# EAGLE board Main_transmitter (EAGLE 9.7.0)
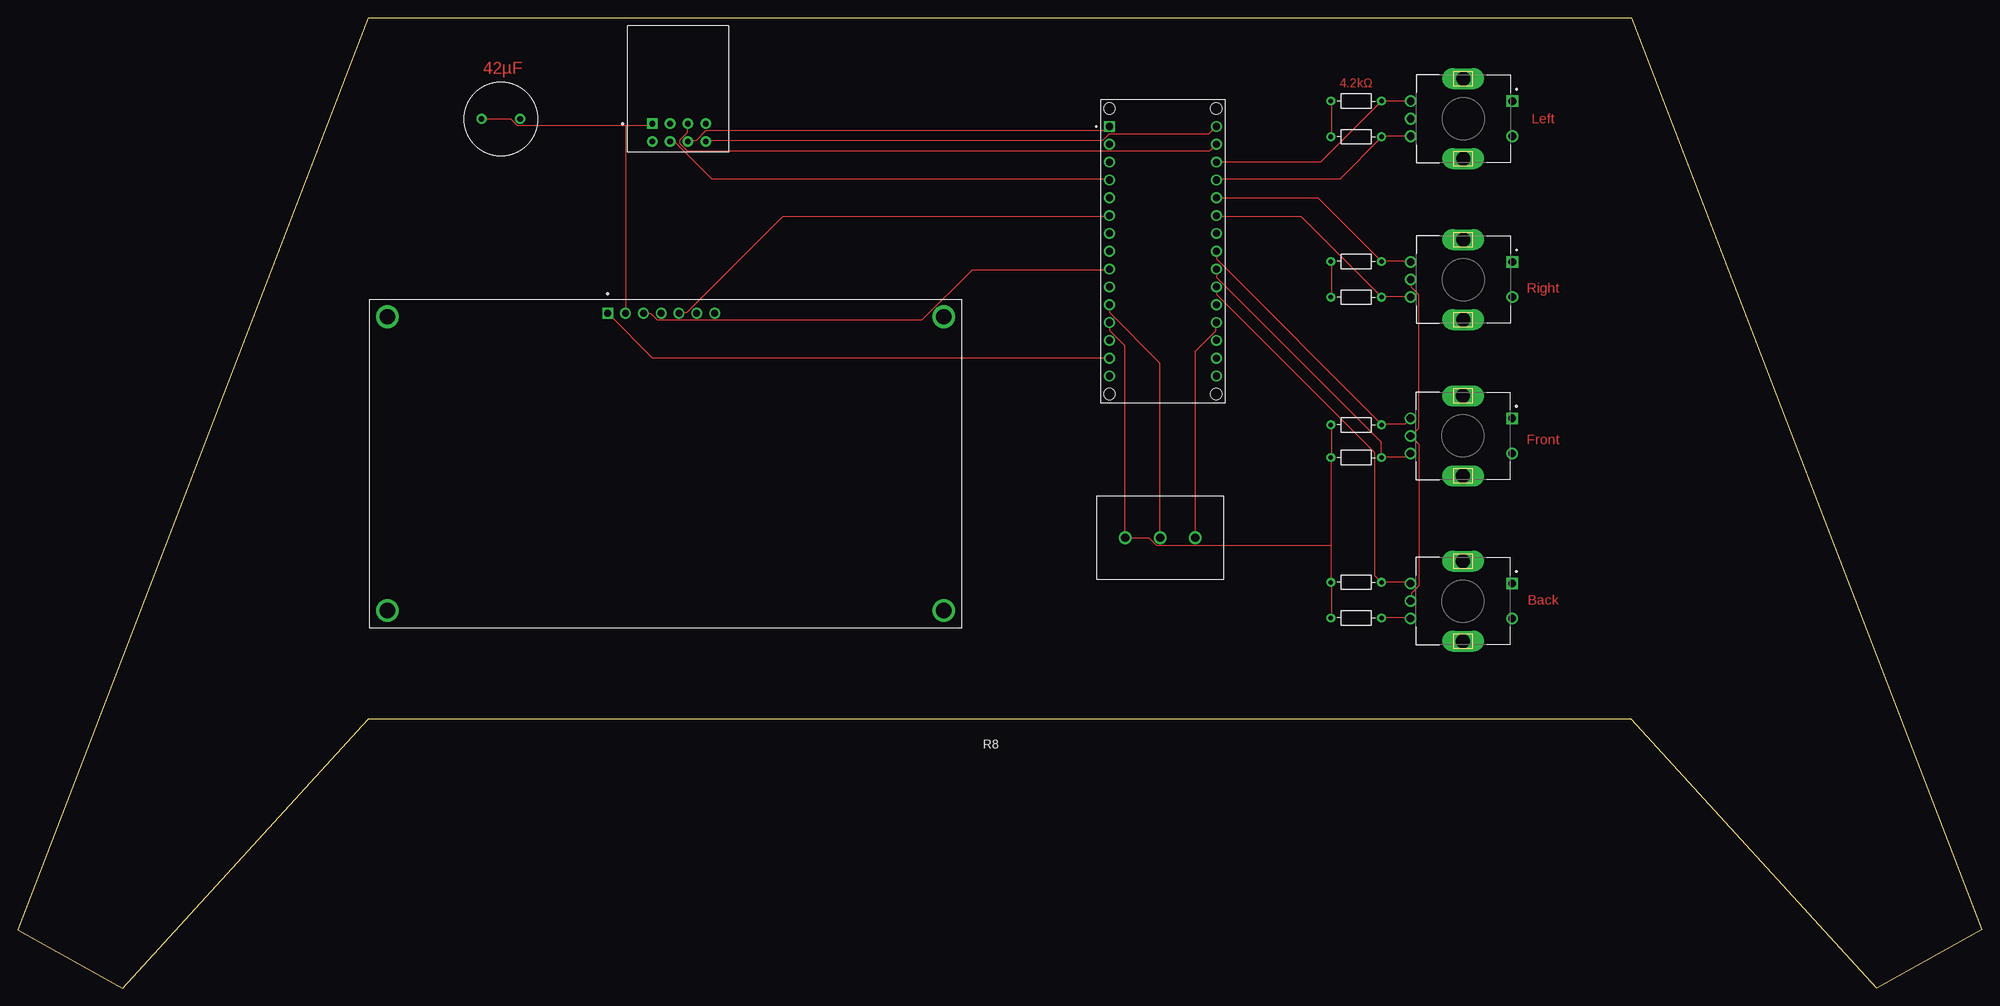
[diagram p0: board, top side]
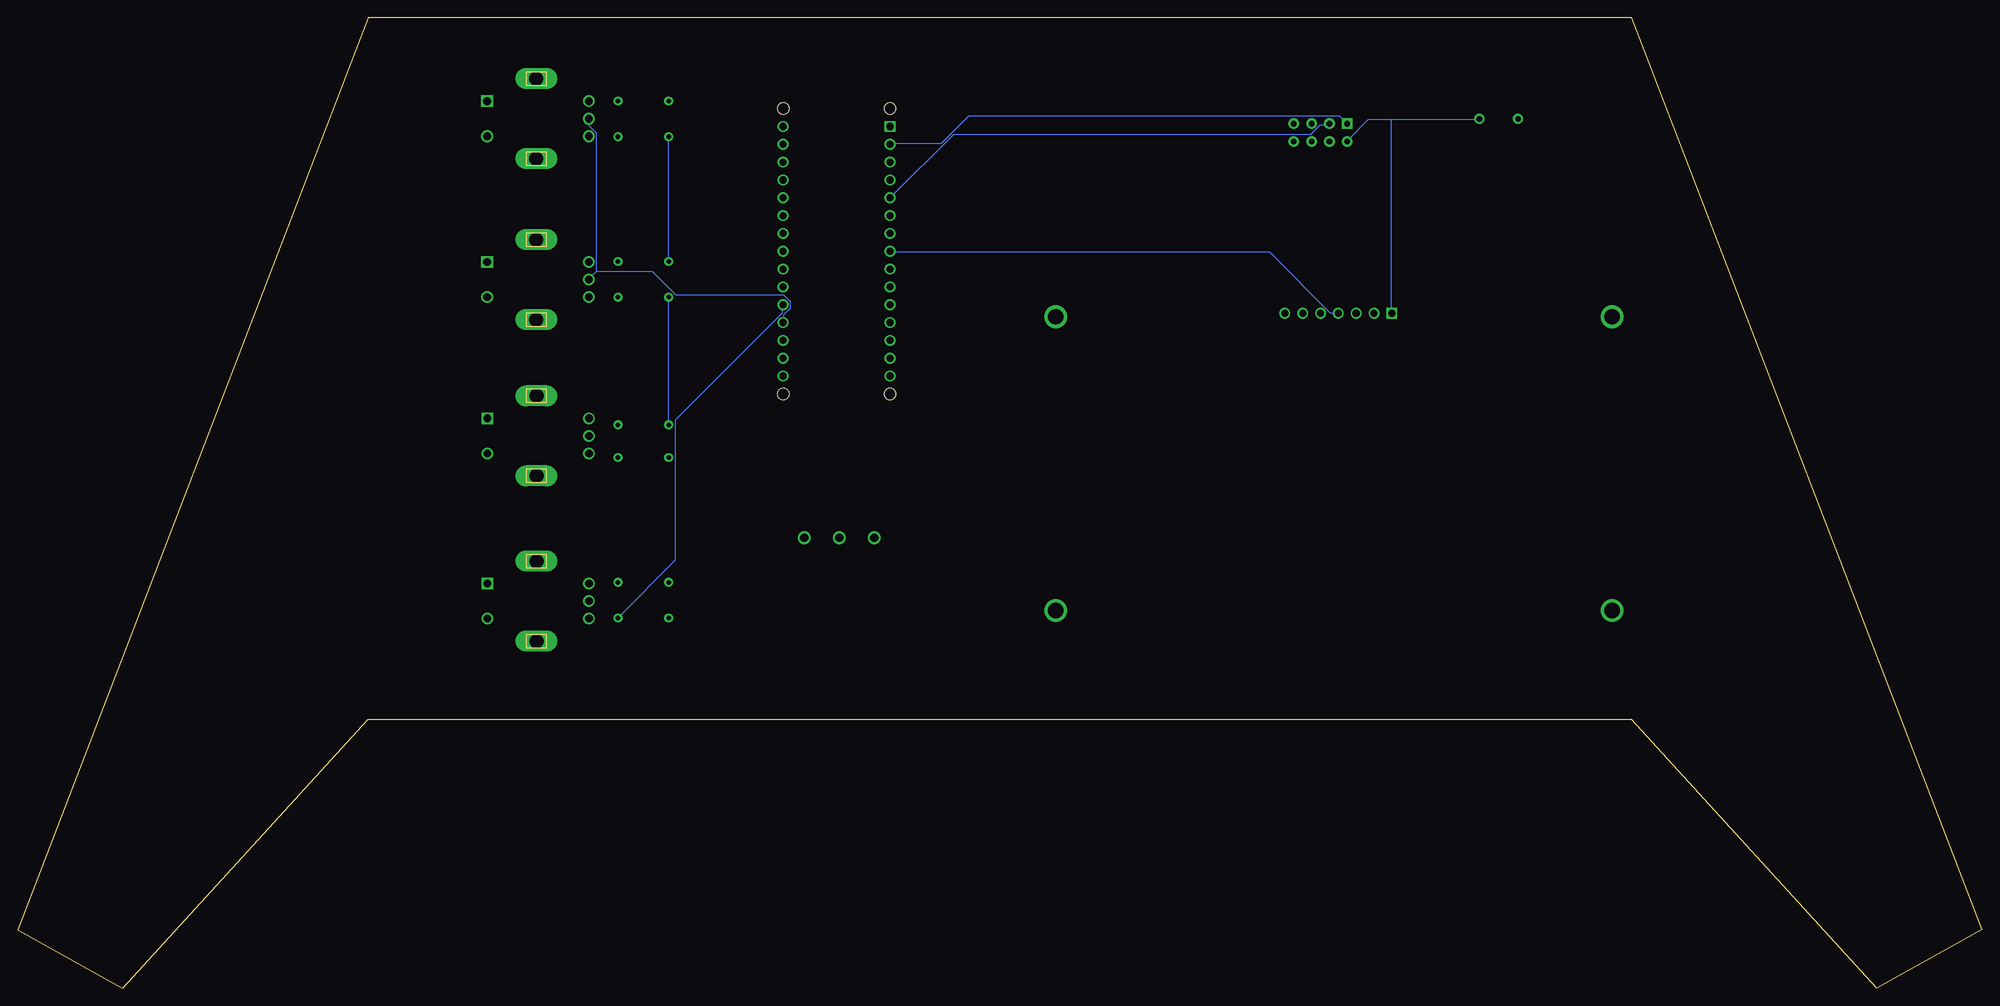
[diagram p1: board, bottom side, seen from below]

Size 280 x 138.33 mm. Coordinates in mm from the lower left corner, seen from the top.
Outline: 50,138.33 0,8.33 15,0 50,38.33 230,38.33 265,0 280,8.33 230,138.33 50,138.33
Copper layers (1*16): Top / Bottom
Stack-up 2 Layer Stack: Top SilkScreen Epoxy Ink / Top SolderMask SR:Green 0.0254mm Dk 4.3 / Top Surface Finish Lead-Free 0.02mm / Top CuFoil:007 0.035mm / Dielectric-1 Core:084 1.067mm / Bottom CuFoil:007 0.035mm / Bottom Surface Finish Lead-Free 0.02mm / Bottom SolderMask SR:Green 0.0254mm Dk 4.3 / Bottom SilkScreen Epoxy Ink
Design rules "default *": minimum track width 6mil, minimum drill 0.35mm, track to track 6mil, track to pad 6mil, pad to pad 6mil, via to via 6mil, smd to smd 6mil, copper to edge 40mil, drill to drill 6mil, minimum pad ring 10mil, minimum via ring 8mil, stop-mask expansion 4mil, vias tented up to drill 0mil, thermal gap 10mil

## Footprints (pad centres in the part's own frame; a part is rotated, then mirrored left to right if it is on the bottom)
CAPRD550W60D1025H1250B = drill 0.8 pad 1.4: 1 -2.75,0; 2 2.75,0
XDCR_PEC11R-4215F-S0024 = drill 1.1 square: 1 -2.5,7 | drill 1.1: 2 2.5,7; A -2.5,-7.5; B 2.5,-7.5; COM 0,-7.5 | drill 2 long: S1 -5.7,0; S2 5.7,0
OLED = drill 1 square: 1 -7.62,17 | drill 1: 2 -5.08,17; 3 -2.54,17; 4 0,17; 5 2.54,17; 6 5.08,17; 7 7.62,17 | drill 2.2: P1 -39.02,16.5; P2 40.29,16.5; P3 -39.02,-25.39; P4 40.29,-25.39
P160 = drill 1.2: 1 -5,0; 2 0,0; 3 5,0
RESAD724W46L381D178B = drill 0.66 pad 1.26: 1 -3.62,0; 2 3.62,0
NANO = drill 1.016 square: 1 -17.78,-7.62 | drill 1.016: 2 -15.24,-7.62; 3 -12.7,-7.62; 4 -10.16,-7.62; 5 -7.62,-7.62; 6 -5.08,-7.62; 7 -2.54,-7.62; 8 0,-7.62; 9 2.54,-7.62; 10 5.08,-7.62; 11 7.62,-7.62; 12 10.16,-7.62; 13 12.7,-7.62; 14 15.24,-7.62; 15 17.78,-7.62; 16 17.78,7.62; 17 15.24,7.62; 18 12.7,7.62; 19 10.16,7.62; 20 7.62,7.62; 21 5.08,7.62; 22 2.54,7.62; 23 0,7.62; 24 -2.54,7.62; 25 -5.08,7.62; 26 -7.62,7.62; 27 -10.16,7.62; 28 -12.7,7.62; 29 -15.24,7.62; 30 -17.78,7.62 | hole 1.651: -20.32,-7.62; -20.32,7.62; 20.32,7.62; 20.32,-7.62
NRF24L01 = drill 0.8 pad 1.5 square: 1 -3.81,-8.31 | drill 0.8 pad 1.5: 2 -1.27,-8.31; 3 1.27,-8.31; 4 3.81,-8.31; 5 -3.81,-10.85; 6 -1.27,-10.85; 7 1.27,-10.85; 8 3.81,-10.85

## Placement (x,y rotation side)
42MUF  [CAPRD550W60D1025H1250B]  68.88,123.89 0 top
B  ENCODER  [XDCR_PEC11R-4215F-S0024]  206.04,55.19 270 top
DS1  OLED  [OLED]  91.74,79.2 0 top
F  ENCODER  [XDCR_PEC11R-4215F-S0024]  206.04,78.72 270 top
L  ENCODER  [XDCR_PEC11R-4215F-S0024]  206.07,123.91 270 top
POT  POTENTIOMETER  [P160]  162.86,64.2 0 top
R  ENCODER  [XDCR_PEC11R-4215F-S0024]  206.07,101 270 top
R1  R-US_AXIAL-7.2MM-PITCH  [RESAD724W46L381D178B]  190.8,126.43 0 top
R2  R-US_AXIAL-7.2MM-PITCH  [RESAD724W46L381D178B]  190.8,121.35 0 top
R3  R-US_AXIAL-7.2MM-PITCH  [RESAD724W46L381D178B]  190.8,103.57 0 top
R4  R-US_AXIAL-7.2MM-PITCH  [RESAD724W46L381D178B]  190.8,98.49 0 top
R5  R-US_AXIAL-7.2MM-PITCH  [RESAD724W46L381D178B]  190.8,80.29 0 top
R6  R-US_AXIAL-7.2MM-PITCH  [RESAD724W46L381D178B]  190.8,75.63 0 top
R7  R-US_AXIAL-7.2MM-PITCH  [RESAD724W46L381D178B]  190.8,57.85 0 top
R8  R-US_AXIAL-7.2MM-PITCH  [RESAD724W46L381D178B]  190.8,52.77 0 top
U1  ARDUINONANO  [NANO]  163.25,105.03 270 top
U2  NRF24L01  [NRF24L01]  94.28,131.51 0 top

## Library data of the parts
42MUF = Capacitor; CATEGORY: Capacitor
B F L R = rotary encoder; MANUFACTURER: J.W.Miller/Bourns; MAXIMUM_PACKAGE_HEIGHT: 21.5 mm; PARTREV: Rev. 09/19; STANDARD: Manufacturer Recommendations
DS1 = OLED; MANUFACTURER: Orient Display; MAXIMUM_PACKAGE_HEIGHT: 5.5mm; PARTREV: O; STANDARD: Manufacturer Recommendations
POT = potentiometer; PARTNO: 987-1304-ND
R1-R8 = Resistor; CATEGORY: Resistor; SUB-CATEGORY: Fixed
U1 = Arduino Nano; MANUFACTURER: Arduino; PARTREV: 6-11-19; STANDARD: Manufacturer Recommendations
U2 = nRF24L01; MANUFACTURER: AI-Thinker; MAXIMUM_PACKAGE_HEIGHT: 11.2 mm; PARTREV: V1.2; STANDARD: Manufacturer recommendations or IPC 7351B

## Nets
N$1: L.A R1.2 U1.28
N$2: L.B R2.2 U1.27
N$3: R3.2 R.A U1.26
N$4: R4.2 R.B U1.25
N$5: F.A R5.2 U1.23
N$6: U1.4 U2.6
N$7: F.B R6.2 U1.22
N$8: U1.5 U2.2
N$9: B.A R7.2 U1.21
N$10: B.B R8.2 U1.20
N$12: B.COM F.COM L.COM POT.3 R.COM U1.19
N$13: U1.30 U2.8
N$14: U1.29 U2.3
N$15: POT.2 U1.11
N$16: DS1.3 U1.9
N$17: DS1.4 U1.8
N$18: 42MUF.1 DS1.2 U1.2 U2.1
N$19: 42MUF.2 DS1.1 U1.14 U2.5
N$20: U1.1 U2.7
N$21: DS1.5 U1.6
N$25: POT.1 R1.1 R2.1 R3.1 R4.1 R5.1 R6.1 R7.1 R8.1 U1.12
VIN: U1.15

## Tracks (layer width: path | path; a pad name or v marks a point on that pad's centre or on a via)
N$1
  Top 0.152: L.A 198.52,126.43 R1.2 194.41,126.43 185.72,117.75 170.94,117.75 U1.28
N$2
  Top 0.152: L.B 198.52,121.4 194.56,121.4 R2.2 194.41,121.25 188.46,115.31 170.94,115.31 U1.27
N$3
  Top 0.152: R.A 198.52,103.57 R3.2 194.41,103.57 185.41,112.57 170.94,112.57 U1.26
N$4
  Top 0.152: R.B 198.52,98.54 194.56,98.54 R4.2 194.41,98.54 182.98,109.97 170.94,109.97 U1.25
N$5
  Top 0.152: F.A 198.52,81.17 197.76,80.41 194.56,80.41 R5.2 194.41,80.41 170.94,103.88 170.94,104.95 U1.23
N$6
  Top 0.152: U2.6 93.06,120.64 93.67,120.64 99,115.31 155.54,115.31 U1.4
N$7
  Top 0.152: F.B 198.52,76.14 198.06,75.68 194.56,75.68 R6.2 194.41,75.68 194.41,77.82 170.94,101.29 170.94,102.35 U1.22
N$8
  Bottom 0.152: U2.2 93.06,123.08 94.28,123.08 95.65,121.71 146.55,121.71 155.54,112.72 U1.5
N$9
  Top 0.152: B.A 198.52,57.7 198.37,57.85 R7.2 194.41,57.85 193.49,58.77 193.49,76.29 170.94,98.85 170.94,99.92 U1.21
N$10
  Top 0.152: R8.2 194.56,52.82 198.52,52.82 B.B
  Bottom 0.152: U1.20 170.94,97.33 170.94,96.26 186.18,81.02 186.18,61.05 194.41,52.82 R8.2
N$12
  Top 0.152: U1.19 170.78,94.73 170.78,93.67 167.89,90.77 167.89,64.25 POT.3 | B.COM 198.67,55.26 198.67,56.33 199.74,57.4 199.74,77.51 198.67,78.58 F.COM 198.67,78.73 199.74,79.8 199.74,98.85 198.67,99.92 198.67,100.98 R.COM
  Bottom 0.152: 197.45,102.2 197.45,121.86 198.52,122.93 198.52,123.84 L.COM | 197.45,102.2 198.52,101.14 R.COM | 197.45,102.2 189.53,102.2 186.18,98.85 170.78,98.85 169.87,97.93 169.87,96.87 170.78,95.95 170.78,94.89 U1.19
N$13
  Top 0.152: U2.8 98.09,120.79 154.63,120.79 155.54,121.71 169.72,121.71 170.78,122.78 U1.30
N$14
  Top 0.152: U2.3 95.5,123.08 95.5,122.01 94.43,120.95 94.43,120.34 95.5,119.27 169.87,119.27 170.78,120.19 U1.29
N$15
  Top 0.152: POT.2 162.86,89.1 155.7,96.26 155.7,97.33 U1.11
N$16
  Top 0.152: DS1.3 89.25,96.11 90.32,96.11 91.23,95.19 128.88,95.19 136.04,102.35 155.54,102.35 U1.9
N$17
  Bottom 0.152: DS1.4 91.84,96.26 92.91,96.26 101.59,104.95 155.54,104.95 U1.8
N$18
  Top 0.152: 86.66,122.93 90.32,122.93 90.47,123.08 U2.1 | 86.66,122.93 71.27,122.93 70.35,123.84 66.24,123.84 42MUF.1 | 86.66,122.93 DS1.2
  Bottom 0.152: U1.2 155.54,120.34 148.38,120.34 144.42,124.3 91.54,124.3 90.47,123.23 U2.1
N$19
  Top 0.152: U1.14 155.54,89.86 90.47,89.86 84.22,96.11 DS1.1
  Bottom 0.152: 84.22,123.84 87.42,123.84 90.47,120.79 U2.5 | 84.22,123.84 71.72,123.84 42MUF.2 | 84.22,123.84 84.22,96.26 DS1.1
N$20
  Top 0.152: U2.7 95.65,120.79 96.72,120.79 98.09,122.17 154.94,122.17 155.54,122.78 U1.1
N$21
  Top 0.152: DS1.5 94.28,96.26 95.35,96.26 109.06,109.97 155.54,109.97 U1.6
N$25
  Top 0.152: U1.12 155.7,94.73 155.7,93.67 157.83,91.53 157.83,64.25 POT.1 157.98,64.1 161.34,64.1 162.4,63.04 187.24,63.04 | R5.1 187.24,80.26 187.24,75.68 R6.1 187.24,75.53 187.24,63.04 | 187.24,57.85 187.24,52.82 R8.1 | 187.24,57.85 187.24,63.04 | 187.24,57.85 R7.1 | R4.1 187.24,98.54 187.24,103.57 R3.1 | R2.1 187.24,121.4 187.24,126.43 R1.1
  Bottom 0.152: R3.1 187.24,103.57 187.24,121.25 R2.1 | R5.1 187.24,80.41 187.24,98.39 R4.1

## Text on the board
Top: 42µF | 4.2kΩ | Left | Right | Front | Back